# Altium PCB Draft 1 - Incomplete.PcbDoc
Units mil, origin at the board's own origin, x right, y up, seen from the top; angles counter-clockwise.
Board outline 10000 x 3000 mil, 2 copper layers (Top Layer, Bottom Layer); 75 components, 133 nets, 486 pads, 97 vias.
Unrouted connection lines stored in the file: 158.
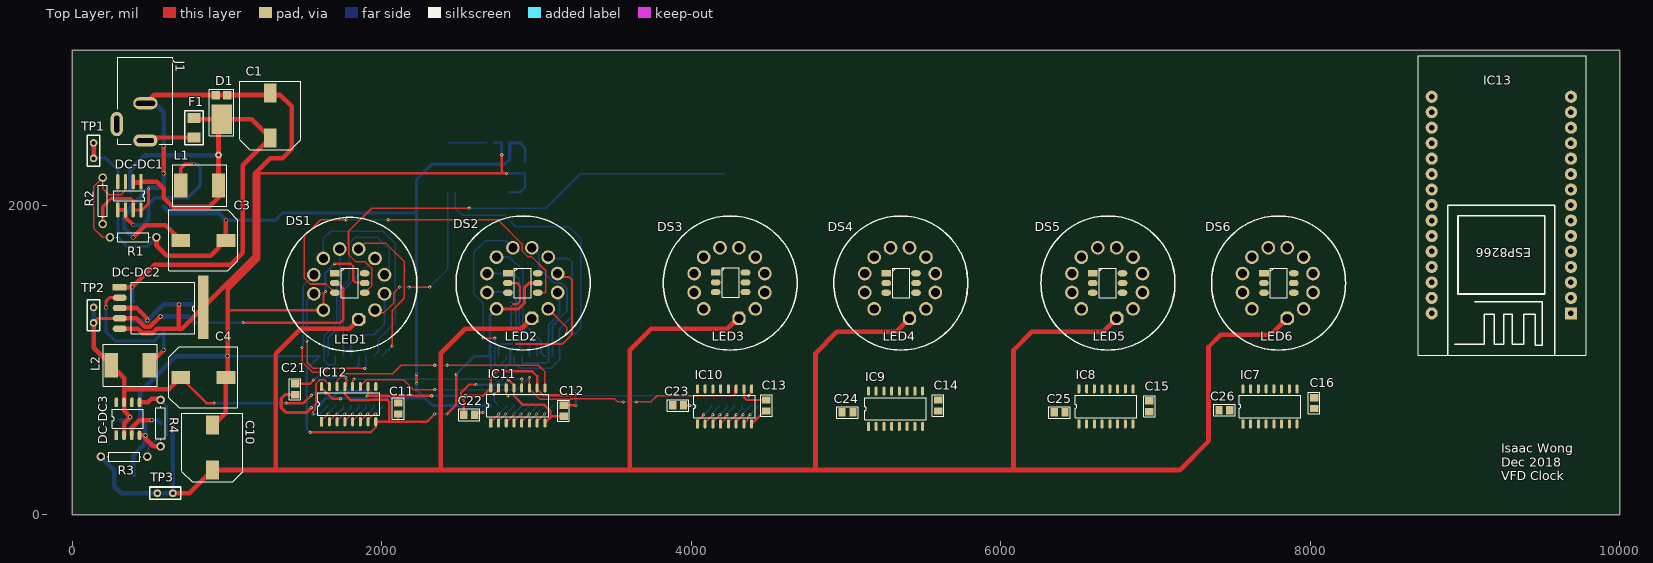
[diagram p0: Top Layer view]
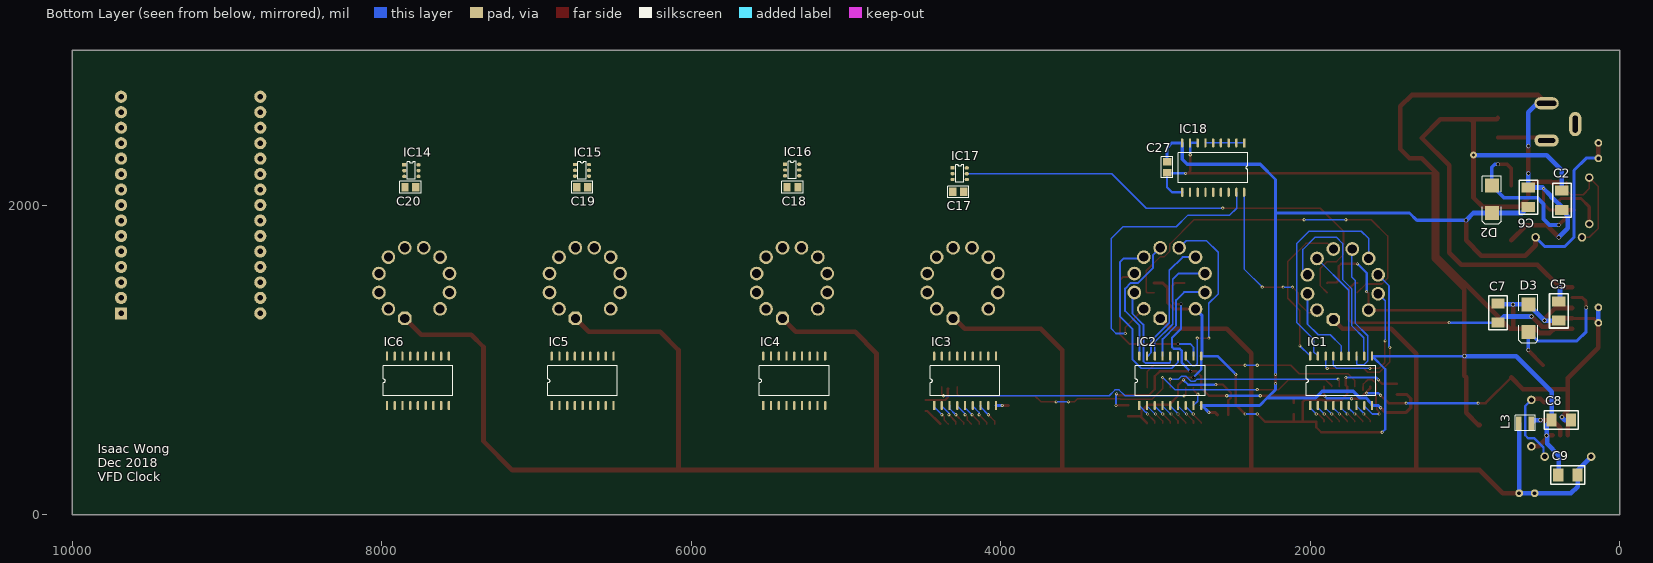
[diagram p1: Bottom Layer view, seen from below]

## Layer stack, top to bottom
Top Solder: solder mask 0.4, Solder Resist, Dk 3.5
Top Layer: signal copper 1.4
Dielectric 1: dielectric 12.6, FR-4, Dk 4.8
Bottom Layer: signal copper 1.4
Bottom Solder: solder mask 0.4, Solder Resist, Dk 3.5

## Board outline
0,0 10000,0 10000,3000 0,3000

## Design rules (kind name [scope] priority, off if disabled: settings)
Clearance [All] p1: gap=10 ignorepadtopadclearanceinfootprint=FALSE except(0: Arc-Hole Track-Hole SMDPad-Hole THPad-Hole Via-Hole Fill-Hole Poly-Hole Region-Hole Text-Hole)
PolygonConnect [All] p1: connectstyle=Relief reliefconductorwidth=10 reliefentries=4 polygonreliefangle="90 Angle" airgapwidth=10
RoutingVias [All] p1: holewidth=10 width=20 viastyle="Through Hole" minholewidth=10 minwidth=18 maxholewidth=30 maxwidth=45
SolderMaskExpansion [All] p1: expansion=4
Width NetF1-1 [InNet('NetF1_1')] p1: maxlimit=30 minlimit=20 preferedwidth=25 minimp=50.000000 maximp=50.000000 favimp=50.000000
Width Vcc [InNet('VCC')] p2: maxlimit=40 minlimit=20 preferedwidth=30 minimp=50.000000 maximp=50.000000 favimp=50.000000
Width 1.5V [InNet('+1.5')] p3: maxlimit=40 minlimit=15 preferedwidth=30 minimp=50.000000 maximp=50.000000 favimp=50.000000
Width 5V [InNet('+5')] p4: maxlimit=40 minlimit=15 preferedwidth=30 minimp=50.000000 maximp=50.000000 favimp=50.000000
Width 27V [InNet('+27')] p5: maxlimit=40 minlimit=20 preferedwidth=30 minimp=50.000000 maximp=50.000000 favimp=50.000000
Width GND [InNet('GND')] p6: maxlimit=40 minlimit=15 preferedwidth=30 minimp=50.000000 maximp=50.000000 favimp=50.000000
30 further rules are at their usual default settings.

## Components (designator, comment, footprint, x,y, rotation, side; value= is the part's Value field where it differs from the comment)
C1 "Polarised Cap" 10x10.2 1279.53,2578.74 r270 top value=470uF
C2 "Cap" 1206 374.02,2031 r90 bottom value=47uF
C3 "Polarised Cap" 10x10.2 846.46,1771.65 r0 top value=470uF
C4 "Polarised Cap" 10x10.2 846.46,885.83 r180 top value=470uF
C5 "Cap" 1206 393.7,1315.45 r90 bottom value=47uF
C6 "Cap" 1206 590.55,2050.69 r270 bottom value=47uF
C7 "Cap" 1206 787.4,1302.66 r270 bottom value=47uF
C8 "Cap" 1206 377.46,610.24 r180 bottom value=47uF
C9 "Cap" 1206 334.65,255.91 r180 bottom value=47uF
C10 "Polarised Cap" 10x10.2 905.51,433.07 r270 top value=470uF
C11 "Cap" 0805 2106.3,685.04 r270 top value=470nF
C12 "Cap" 0805 3175,670.43 r270 top value=470nF
C13 "Cap" 0805 4485,705 r270 top value=470nF
C14 "Cap" 0805 5595,705 r90 top value=470nF
C15 "Cap" 0805 6960,699.57 r270 top value=470nF
C16 "Cap" 0805 8025,720 r270 top value=470nF
C17 "Cap" 0805 4275,2085 r0 bottom value=470nF
C18 "Cap" 0805 5345.43,2115 r0 bottom value=470nF
C19 "Cap" 0805 6705,2115 r0 bottom value=470nF
C20 "Cap" 0805 7815,2115 r0 bottom value=470nF
C21 "Cap" 0805 1440,810 r90 top value=470nF
C22 "Cap" 0805 2565,645 r180 top value=470nF
C23 "Cap" 0805 3915,705 r180 top value=470nF
C24 "Cap" 0805 5010,660 r180 top value=470nF
C25 "Cap" 0805 6380.43,660 r180 top value=470nF
C26 "Cap" 0805 7445.43,675 r180 top value=470nF
C27 "Cap" 0805 2925,2244.57 r270 bottom value=470nF
D1 "Diode" PowerDi5 964.57,2598.43 r180 top
D2 "Schottky" SMB 826.77,2037.4 r270 bottom
D3 "Schottky" SMB 590.55,1269.69 r270 bottom
DC-DC1 "XL6001E1" SOP8 443.7,2151.18 r270 top
DC-DC2 "XL2596S-5.0E1" TO-263-5 306.46,1468.58 r0 top
DC-DC3 "NCP1579DR2G" SOP8-Buck 284.65,511.81 r90 top
DS1 "IV-11" IV-11 1794.25,1487.99 r0 top
DS2 "IV-11" IV-11 2913.39,1496.06 r0 top
DS3 "IV-11" IV-11 4251.97,1496.06 r0 top
DS4 "IV-11" IV-11 5354.33,1496.06 r0 top
DS5 "IV-11" IV-11 6692.91,1496.06 r0 top
DS6 "IV-11" IV-11 7795.28,1496.06 r0 top
F1 "SMD Fuse" 1206 787.4,2500 r90 top
IC1 "MIC2981BWM" "SOP18 (WM)" 2000.39,704.72 r90 bottom
IC2 "MIC2981BWM" "SOP18 (WM)" 3104.33,704.72 r90 bottom
IC3 "MIC2981BWM" "SOP18 (WM)" 4430.71,704.72 r90 bottom
IC4 "MIC2981BWM" "SOP18 (WM)" 5534.65,704.72 r90 bottom
IC5 "MIC2981BWM" "SOP18 (WM)" 6901.97,704.72 r90 bottom
IC6 "MIC2981BWM" "SOP18 (WM)" 7966.54,704.72 r90 bottom
IC7 "74HC595D" SO16 7565,551 r90 top
IC8 "74HC595D" SO16 6505,551 r90 top
IC9 "74HC595D" SO16 5145,536 r90 top
IC10 "74HC595D" SO16 4040,551 r90 top
IC11 "74HC595D" SO16 2704.33,556.55 r90 top
IC12 "74HC595D" SO16 1611.02,565.5 r90 top
IC13 "ESP8266" ESP8266 9685.04,1300 r180 top
IC14 "PI4ULS5V201" SOT23-6L 7854.33,2259.84 r180 bottom
IC15 "PI4ULS5V201" SOT23-6L 6751.97,2261.81 r180 bottom
IC16 "PI4ULS5V201" SOT23-6L 5393.7,2263.78 r180 bottom
IC17 "PI4ULS5V201" SOT23-6L 4311.02,2240.16 r180 bottom
IC18 "MIC2981BWM" "SOP18 (WM)" 2427.17,2401.57 r270 bottom
J1 "DC-005" NINIGI_DC-005 472.44,2523.62 r270 top
L1 "22uH" 7x7 822.83,2125.98 r180 top
L2 "22uH" 7x7 374.02,964.57 r180 top
L3 "2.2uH" "1008 Inductor" 610.87,590.55 r0 bottom
LED1 "WS2813B" 5050 1696.85,1559.06 r0 top
LED2 "WS2813B" 5050 2814.96,1559.06 r0 top
LED3 "WS2813B" 5050 4157.48,1562.99 r0 top
LED4 "WS2813B" 5050 5259.84,1559.06 r0 top
LED5 "WS2813B" 5050 6594.49,1559.06 r0 top
LED6 "WS2813B" 5050 7700.79,1559.06 r0 top
R1 "Res1" AXIAL-0.3 393.7,1791.34 r0 top value=150K
R2 "Res1" AXIAL-0.3 196.85,2027.56 r90 top value=1.2K
R3 "Res1" AXIAL-0.3 334.65,374.02 r180 top value=88.7K
R4 "Res1" AXIAL-0.3 570.87,590.55 r90 top value=59K
TP1 "2P Test Point" 2P-TestPoint 137.8,2301.57 r90 top
TP2 "2P Test Point" 2P-TestPoint 137.8,1238.58 r90 top
TP3 "2P Test Point" 2P-TestPoint 649.61,137.8 r180 top

## Footprints (in the part's own frame and the unit in brackets; to place one, negate y for a bottom-side part, rotate by r counter-clockwise, add the part's x,y. Pads: shape width x height; smd on the part's side, far side on the other; paste and mask are expansions set on the pad)
2P-TestPoint [mil]
  round 50 hole 25: TP(0,0) TP(100,0)
  silkscreen extent -50,-40 150,40
7x7 [mm]
  rect 2.2x4 smd: 1(-3.1,0) 2(3.1,0)
  silkscreen extent -4.44,-3.43 4.45,3.43
10x10.2 [mm]
  rect 3.1x2.1 smd: 1(-3.7,0) 2(3.7,0)
  silkscreen extent -5.64,-5 5.64,5
0805 [mm] "Chip Resistor, Body 2.0x1.2mm, IPC Medium Density"
  rect 1.2x1.4 smd: 1(-0.9,0) 2(0.9,0)
  silkscreen extent -1.75,-0.95 1.75,0.95
"1008 Inductor" [mm]
  rect 0.9x2.2 smd: 1(-1.016,0) 2(1.016,0)
  silkscreen extent -1.65,-1.27 1.65,1.27
1206 [mil]
  rect 65x85 smd: 1(-62.5,0) 2(62.5,0)
  silkscreen extent -110,-60 110,60
5050 [mm]
  rect 1.6x1 smd: 1(0,0)
  oval 1.6x1 smd: 2(0,-1.6) 3(0,-3.2) 4(4.9,-3.2) 5(4.9,-1.6) 6(4.9,0)
  silkscreen extent 1.07,-4 3.86,0.8
AXIAL-0.3 [mm] "Axial Device, Thru-Hole; 2 Leads; 0.3 in Pin Spacing"
  round 1.4 hole 0.85: 1(-3.81,0) 2(3.81,0)
  silkscreen extent -2.77,-0.76 2.77,0.76
ESP8266 [mm]
  rect 2x2 hole 0.9: 1(0,0)
  round 2 hole 0.9: 2(0,-2.54) 3(0,-5.08) 4(0,-7.62) 5(0,-10.16) 6(0,-12.7) 7(0,-15.24) 8(0,-17.78) 9(0,-20.32) 10(0,-22.86) 11(0,-25.4) 12(0,-27.94) 13(0,-30.48) 14(0,-33.02) 15(0,-35.56) 16(22.86,-35.56) 17(22.86,-33.02) 18(22.86,-30.48) 19(22.86,-27.94) 20(22.86,-25.4) 21(22.86,-22.86) 22(22.86,-20.32) 23(22.86,-17.78) 24(22.86,-15.24) 25(22.86,-12.7) 26(22.86,-10.16) 27(22.86,-7.62) 28(22.86,-5.08) 29(22.86,-2.54) 30(22.86,0)
  silkscreen extent -2.41,-42.29 25.15,6.86
IV-11 [mm]
  round 2.25 / inner round 1.524 / far side round 2.25 hole 1.5: A(1.426,5.795) B(-4.37,4.243) C(-5.922,1.553) D(-5.922,-1.553) DP(5.668,1.553) E(5.668,-1.553) F(4.116,4.243) F-(-4.37,-4.243) G(-1.68,5.795) Grid(4.116,-4.243)
  oct 2.179x2.179 / inner oct 1.524x1.524 / far side oct 2.179x2.179 hole 1.5: F+(1.426,-5.795)
  silkscreen extent -11,-11 11,11
NINIGI_DC-005 [mm]
  oval 2x4 hole 0.75 slot 2.794 at 90 deg: 2(2.7,0)
  oval 4x2 hole 0.8 slot 2.794 at 0 deg: 4(0,-4.7)
  oval 2x4 hole 0.801 slot 3.2 at 90 deg: 5(-3.4,0)
  silkscreen extent -11,-4.5 3.3,4.5
PowerDi5 [mm]
  rect 1.39x1.4 smd: 1(-0.92,-2.856) 2(0.92,-2.856)
  rect 3.36x4.86 smd: 3(0,1.126)
  silkscreen extent -1.98,-3.81 1.98,3.81
SMB [mm] "DO-214-AA/SMB; 2 C-Bend Leads; Body 5.3 x 3.6 mm, inc. leads (LxW)"
  rect 2.3x2.3 smd: 1(-2.25,0) 2(2.25,0)
  silkscreen extent -3.8,-1.55 4.1,1.55
SO16 [mm]
  rect 1.5x0.5 smd: 1(0.864,0)
  oval 1.5x0.5 smd: 2(0.864,-1.27) 3(0.864,-2.54) 4(0.864,-3.81) 5(0.864,-5.08) 6(0.864,-6.35) 7(0.864,-7.62) 8(0.864,-8.89) 9(6.636,-8.89) 10(6.636,-7.62) 11(6.636,-6.35) 12(6.636,-5.08) 13(6.636,-3.81) 14(6.636,-2.54) 15(6.636,-1.27) 16(6.636,0)
  silkscreen extent 1.91,-9.53 5.59,0.64
SOP8 [mil]
  rect 98.42x22 smd: 1(0,0)
  oval 98.43x22 smd: 2(0,-50) 3(0,-100) 4(0,-150) 5(182.68,-150) 6(182.68,-100) 7(182.68,-50) 8(182.68,0)
  silkscreen extent 57,-175 125,25
SOP8-Buck [mil]
  rect 63x24 smd: 1(0,0)
  oval 63x24 smd: 2(0,-50) 3(0,-100) 4(0,-150) 5(213,-150) 6(213,-100) 7(213,-50) 8(213,0)
  silkscreen extent 45,-175 170,25
"SOP18 (WM)" [mm]
  rect 1.5x0.381 smd: 1(0,0)
  oval 1.5x0.381 smd: 2(0,-1.27) 3(0,-2.54) 4(0,-3.81) 5(0,-5.08) 6(0,-6.35) 7(0,-7.62) 8(0,-8.89) 9(0,-10.16) 10(8.1,-10.16) 11(8.1,-8.89) 12(8.1,-7.62) 13(8.1,-6.35) 14(8.1,-5.08) 15(8.1,-3.81) 16(8.1,-2.54) 17(8.1,-1.27) 18(8.1,0)
  silkscreen extent 1.58,-10.79 6.52,0.63
SOT23-6L [mm]
  rect 0.7x0.55 smd: 1(0,0)
  oval 0.7x0.55 smd: 2(0,-0.95) 3(0,-1.9) 4(2.325,-1.9) 5(2.325,-0.95) 6(2.325,0)
  silkscreen extent 0.51,-2.38 1.83,0.48
TO-263-5 [mm]
  rect 2.3x1.05 smd: 1(0,0)
  oval 2.3x1.05 smd: 2(0,-1.7) 3(0,-3.4) 4(0,-5.1) 5(0,-6.8)
  rect 1.66x10.428 smd: 3(13.716,-3.302)
  silkscreen extent 1.89,-7.65 12.32,0.85

## Part data
D2 D3: library part "D Schottky", "Schottky Diode", Code_JEDEC=DO-214-AA, LatestRevisionDate=17-Jul-2002, LatestRevisionNote="Re-released for DXP Platform.", PackageDescription="DO-214-AA/SMB; 2 C-Bend Leads; Body 5.3 x 3.6 mm, inc. leads (LxW)", PackageReference=SMB, Published=8-Jun-2000, Publisher="Altium Limited"
J1: Package=None, Availability=Unavailable, MF="Best Inc.", MP=DC-005, Price=None, SnapEDA_Link=https://www.snapeda.com/parts/DC-005/Best%20Inc./view-part/?ref=snap
L1 L2: library part BCIHP0730
L3: library part "SMD Inductor 1008"
R1 R2 R3 R4: "Resistor", LatestRevisionDate=17-Jul-2002, LatestRevisionNote="Re-released for DXP Platform.", PackageDescription="Axial Device, Thru-Hole; 2 Leads; 0.3 in Pin Spacing", PackageReference=AXIAL-0.3, Published=8-Jun-2000, Publisher="Altium Limited"
C1 C3 C4 C10: PackageDescription="Capacitor; 2 Leads", PackageReference=CAPR5-4X5, Published=23-Sep-2002, Publisher="Altium Limited"
C2 C5 C6 C7 C8 C9 C11 C12 C13 C14 C15 C16 C17 C18 C19 C20 C21 C22 C23 C24 C25 C26 C27: LatestRevisionDate=17-Jul-2002, LatestRevisionNote="Re-released for DXP Platform.", PackageDescription="Radial Cap, Thru-Hole; 2 Leads; 0.3 in Pin Spacing", PackageReference=RAD-0.3, Published=8-Jun-2000, Publisher="Altium Limited"
D1: Code_JEDEC=DO-214-AB, LatestRevisionDate=17-Jul-2002, LatestRevisionNote="Re-released for DXP Platform.", PackageDescription="DO-214-AB/SMC; 2 C-Bend Leads; Body 7.9 x 5.9 mm, inc. leads (LxW)", PackageReference=SMC, PackageVersion=Sep-1996, Published=8-Jun-2000, Publisher="Altium Limited"

## Via types
v1: diameter 20, hole 10, Top Layer to Bottom Layer, 76 vias
v2: diameter 25, hole 20, Top Layer to Bottom Layer, 16 vias
v3: diameter 20, hole 20, Top Layer to Bottom Layer, 4 vias
v4: diameter 45, hole 20, Top Layer to Bottom Layer, 1 vias

## Nets (pads, with @x,y where several pads share a name; then routed paths per layer and width w, separated by ;. In a path a pad name is that pad's centre, name@x,y a point inside that pad or via, vN(x,y) a via of type N, cw(c..) or ccw(c..) an arc to the next point about the centre after c; other vN are vias at no path point)
+1.5: C9.2 C10.2 DS1.F+ DS2.F+ DS3.F+ DS4.F+ DS5.F+ DS6.F+ L3.2 R3.2 TP3.TP | length 16471.7
  Top Layer w30: TP3.TP@649.61,137.8 755.91,137.8 C10.2 1318.9,287.4 ; DS1.F+ 1791.34,1200.79 1476.38,1200.79 1315,1039.41 1315,291.3 1318.9,287.4 ; DS2.F+ 2902.4,1200.79 2539.37,1200.79 2381.89,1043.31 2381.89,287.4 ; DS3.F+ 4299.41,1267.91 4232.28,1200.79 3740.16,1200.79 3602.36,1062.99 3602.36,287.4 ; DS4.F+ 5323.66,1181.1 4940.94,1181.1 4803.15,1043.31 4803.15,287.4 ; DS5.F+ 6662.24,1181.1 6200.79,1181.1 6082.68,1062.99 6082.68,287.4 ; DS6.F+ 7744.92,1161.42 7421.26,1161.42 7342.52,1082.68 7342.52,472.44 7157.48,287.4 6082.68,287.4 ; 1318.9,287.4 2381.89,287.4 ; 2381.89,287.4 3602.36,287.4 ; 3602.36,287.4 4803.15,287.4 ; 4803.15,287.4 6082.68,287.4
  Bottom Layer w30: R3.2 272.15,286.52 C9.2 272.15,180.61 314.96,137.8 549.61,137.8 649.61,137.8 649.61,589.29 L3.2
+3.3: IC13.11 IC14.3 IC14.6 IC15.3 IC15.6 IC16.3 IC16.6 IC17.3 IC17.6
+5: C4.2 C7.2 C8.2 C11.1 C12.1 C13.1 C14.1 C15.1 C16.1 C17.1 C18.1 C19.1 C20.1 DC-DC2.4 DC-DC3.2 DC-DC3.7 IC7.10 IC7.16 IC8.10 IC8.16 IC9.10 IC9.16 IC10.10 IC10.16 IC11.10 IC11.16 IC12.10 IC12.16 IC13.15 IC14.4 IC15.4 IC16.4 IC17.4 L2.2 LED1.2 LED2.2 LED3.2 LED4.2 LED5.2 LED6.2 TP2.TP | length 7586.7
  Top Layer w15: C4.2 866.61,720 v1(915,720) ; v1(1102.36,1240.16) 1732.28,1240.16 1751.97,1259.84 1751.97,1456.69 1712.6,1496.06 LED1.2 ; v1(1380,720) 1494.02,720 v1(1545,770.98) ; IC12.16 1611.02,818.42 1635,794.44 v1(1635,784.25) 1645.19,784.25 1681.41,748.03 v1(1732.28,748.03) ; IC12.10 1911.02,771.02 v1(1905,765) 1909.88,765 1912.6,767.72 2106.3,767.72 ; C11.1 2106.3,767.72 ; v1(2322.83,767.72) 2106.3,767.72 ; v1(2539.37,767.72) 2654.22,767.72 IC11.16 2704.33,893.31 2736.22,925.2 v3(2775.59,925.2) 2972.44,925.2 3004.33,893.31 IC11.10 3004.33,809.47 3043.01,770.8 3185.8,770.8 3186.07,770.53 3241.56,770.53 v1(3251.02,780) ; LED2.2 2874.02,1496.06 2893.7,1476.38 2893.7,1377.95 2874.02,1358.27 2837.91,1358.27 v3(2834.65,1361.53) ; C12.1 3254.13,705.87 v1(3255,705) ; IC10.10 4342.58,812.28 4342.58,756.33 4358.69,740.22 4485,740.22 C13.1
  Top Layer w20: TP2.TP@137.8,1238.58 167.01,1267.8 DC-DC2.4
  Top Layer w30: TP2.TP@137.8,1238.58 137.8,1078.74 L2.2 334.65,881.89 334.65,810 ; DC-DC2.4 413.82,1267.8 468.67,1212.95 501.8,1212.95 568.38,1279.53 v2(570.87,1279.53) ; DC-DC3.2 334.65,590.55 v2(374.02,629.92) 334.65,669.29 DC-DC3.7 334.65,810 ; C4.2 624.96,810 334.65,810
  Bottom Layer w15: C7.2 v1(1102.36,1240.16) ; v1(915,720) v1(1380,720) ; v1(1545,770.98) 1558.27,784.25 v1(1635,784.25) ; v1(1732.28,748.03) 1736,751.75 1893.48,751.75 1905,763.27 v1(1905,765) ; v1(2322.83,767.72) v1(2539.37,767.72) ; v3(2775.59,925.2) 2829.33,978.94 2829.33,1057.68 2834.65,1062.99 2836.32,1062.99 2843.98,1070.65 2881.67,1070.65 2893.7,1082.68 2893.7,1141.73 2834.65,1200.79 v3(2834.65,1361.53) ; v1(3251.02,780) 3255,776.02 v1(3255,705)
  Bottom Layer w30: TP2.TP@137.8,1238.58 TP2.TP@137.8,1338.58 ; C8.2 354.33,610.24 v2(374.02,629.92) ; v2(570.87,1279.53) 748.03,1279.53 C7.2
+27: C3.2 C6.2 C21.1 C22.1 C23.1 C24.1 C25.1 C26.1 C27.1 D2.2 IC1.9 IC2.9 IC3.9 IC4.9 IC5.9 IC6.9 IC18.9 R1.2 TP1.TP | length 7636.8
  Top Layer w20: C21.1 1374.57,774.57 1350,750 1350,690 1380,660 1515,660 v1(1545,690) ; v1(2224.41,846.46) v1(2224.41,905.51) ; C22.1 2615.43,660 v1(2655,660) ; C23.1 v1(3990,705)
  Top Layer w30: TP1.TP@137.8,2301.57 TP1.TP@137.8,2401.57 ; R1.2 543.7,1739.76 610.24,1673.23 893.7,1673.23 C3.2 v2(992.13,1901.57)
  Bottom Layer w20: TP1.TP@137.8,2301.57 139.37,2303.15 216.54,2303.15 295.28,2224.41 295.28,1791.34 354.33,1732.28 484.65,1732.28 R1.2 ; v2(992.13,1901.57) 1311.02,1901.57 1358.27,1948.82 2224.41,1948.82 ; v1(1545,690) 1559.72,704.72 IC1.9 1600.39,712.53 1622.89,735.03 1622.89,738.14 1639,754.25 1679.45,754.25 1721.99,796.79 1922.41,796.79 1964.95,754.25 2273.94,754.25 2275.59,755.91 ; v1(2224.41,846.46) 2224.41,807.09 2275.59,755.91 ; v1(2224.41,905.51) 2224.41,1948.82 ; v1(2655,660) IC2.9@2699.72,704.72 ; IC2.9 IC2.9@2699.72,704.72 ; C27.1 2925,2370 2893.43,2401.57 IC18.9 2827.17,2295.67 2795.28,2263.78 2322.83,2263.78 2224.41,2165.35 2224.41,1948.82 ; v1(3990,705) 4030.43,705 IC3.9 ; 2275.59,755.91 2326.77,704.72 IC2.9@2699.72,704.72
  Bottom Layer w30: C6.2 629.92,1948.82 D2.2 944.88,1948.82 v2(992.13,1901.57)
DS1-1: DS1.A IC1.18 | length 1028.9
  Top Layer w10: DS1.A 1886.22,1751.97 2027.56,1751.97 2145,1634.53 2145,1396.97 2066.93,1318.9 v1(2066.93,1090.16)
  Bottom Layer w10: IC1.18 v1(2066.93,1090.16)
DS1-2: DS1.B IC1.17 | length 1429.7
  Bottom Layer w10: DS1.B 1622.22,1783.29 1669.64,1830.71 2007.87,1830.71 2086.61,1751.97 2086.61,1240.16 1977.89,1131.44 1977.89,1051.12 IC1.17
DS1-3: DS1.C IC1.16 | length 1119.9
  Top Layer w10: v1(1485,1080) 1485,986.72 1551.83,919.88 1628.54,919.88 1653.54,944.88 v1(1889.76,944.88)
  Bottom Layer w10: v1(1485,1080) 1490.75,1085.75 1490.75,1478.78 DS1.C ; v1(1889.76,944.88) 1900.39,955.51 IC1.16
DS1-4: DS1.D IC1.15 | length 879.5
  Top Layer w10: v1(1515.75,1122.05) 1518.56,1119.23 1518.56,981.44 1555.12,944.88 v1(1614.17,944.88)
  Bottom Layer w10: v1(1515.75,1122.05) 1515.75,1381.5 DS1.D ; v1(1614.17,944.88) 1830.71,944.88 1850.39,964.57 IC1.15
DS1-5: DS1.E IC1.14 | length 539.2
  Bottom Layer w10: IC1.14 1800.39,1091.73 1870.08,1161.42 1948.82,1161.42 2017.4,1230 DS1.E
DS1-6: DS1.F IC1.13 | length 716.7
  Bottom Layer w10: IC1.13 1750.39,1449.13 DS1.F
DS1-7: DS1.G IC1.12 | length 905.8
  Bottom Layer w10: IC1.12 1700.39,972.05 1694.97,966.62 1653.54,966.62 1627.89,992.27 1627.89,1155.45 1710.39,1237.95 1710.39,1513.54 1732.28,1535.43 1732.28,1711.97 DS1.G
DS1-8: DS1.DP IC1.11 | length 1267.4
  Bottom Layer w10: IC1.11 1653.54,1026.77 1653.54,1141.73 1730.39,1218.58 1730.39,1457.42 1791.1,1518.12 1791.1,1751.73 1830.71,1791.34 1968.5,1791.34 2047.24,1712.6 2047.24,1578.97 DS1.DP
DS2-1: DS2.A IC2.18 | length 861.3
  Bottom Layer w12: DS2.A 3015.12,1678.62 3015.12,1593.35 3111.56,1496.91 3159.82,1496.91 3196.83,1459.9 3196.83,1315.32 3104.33,1222.82 IC2.18
DS2-2: DS2.B IC2.17 | length 820
  Bottom Layer w12: DS2.B 2825.1,1663.09 2910.64,1577.55 2910.64,1239.84 3027.83,1122.65 3027.83,1046.97 3051.18,1023.62 IC2.17
DS2-3: DS2.C IC2.16 | length 768.6
  Bottom Layer w12: DS2.C 2852.25,1557.2 2888.64,1520.81 2888.64,1230.73 3004.33,1115.04 IC2.16
DS2-4: DS2.D IC2.15 | length 606.7
  Bottom Layer w12: DS2.D 2682.32,1437.01 2814.96,1437.01 2866.64,1385.33 2866.64,1221.62 2954.33,1133.92 IC2.15
DS2-5: DS2.E IC2.14 | length 700.4
  Bottom Layer w12: IC2.14 2904.33,982.5 2908.74,978.09 3064.06,978.09 3077.83,991.86 3077.83,1227.44 3149.61,1299.21 3149.61,1421.85 DS2.E
DS2-6: DS2.F IC2.13 | length 1203
  Bottom Layer w12: IC2.13 2854.33,984.25 2893.7,944.88 3090.55,944.88 3149.61,1003.94 3149.61,1200.79 3228.35,1279.53 3228.35,1633.86 3208.66,1653.54 3084.97,1653.54 DS2.F
DS2-7: DS2.G IC2.12 | length 1240.3
  Top Layer w10: v1(2655,1140) v1(2730,1140)
  Bottom Layer w10: v1(2655,1140) 2655,1365 2595,1425 2595,1695 2670,1770 2801.46,1770 DS2.G ; v1(2730,1140) 2730,975 2745,960 2760,960 2804.33,1004.33 IC2.12
DS2-8: DS2.DP IC2.11 | length 1028.1
  Top Layer w12: v3(2854.33,1102.36) 3169.29,1102.36 3228.35,1161.42 3228.35,1515.75 3208.66,1535.43 3158.31,1535.43 DS2.DP
  Bottom Layer w12: IC2.11 2754.33,1081.1 2775.59,1102.36 v3(2854.33,1102.36)
DS3-1: DS3.A IC3.18
DS3-2: DS3.B IC3.17
DS3-3: DS3.C IC3.16
DS3-4: DS3.D IC3.15
DS3-5: DS3.E IC3.14
DS3-6: DS3.F IC3.13
DS3-7: DS3.G IC3.12
DS3-8: DS3.DP IC3.11
DS4-1: DS4.A IC4.18
DS4-2: DS4.B IC4.17
DS4-3: DS4.C IC4.16
DS4-4: DS4.D IC4.15
DS4-5: DS4.E IC4.14
DS4-6: DS4.F IC4.13
DS4-7: DS4.G IC4.12
DS4-8: DS4.DP IC4.11
DS5-1: DS5.A IC5.18
DS5-2: DS5.B IC5.17
DS5-3: DS5.C IC5.16
DS5-4: DS5.D IC5.15
DS5-5: DS5.E IC5.14
DS5-6: DS5.F IC5.13
DS5-7: DS5.G IC5.12
DS5-8: DS5.DP IC5.11
DS6-1: DS6.A IC6.18
DS6-2: DS6.B IC6.17
DS6-3: DS6.C IC6.16
DS6-4: DS6.D IC6.15
DS6-5: DS6.E IC6.14
DS6-6: DS6.F IC6.13
DS6-7: DS6.G IC6.12
DS6-8: DS6.DP IC6.11
GND: C1.1 C2.1 C3.1 C4.1 C5.1 C6.1 C7.1 C8.1 C9.1 C10.1 C11.2 C12.2 C13.2 C14.2 C15.2 C16.2 C17.2 C18.2 C19.2 C20.2 C21.2 C22.2 C23.2 C24.2 C25.2 C26.2 C27.2 D1.1 D1.2 D3.1 DC-DC1.7 DC-DC1.8 DC-DC2.3 DC-DC2.5 DC-DC3.4 DS1.F- DS2.F- DS3.F- DS4.F- DS5.F- DS6.F- IC1.10 IC2.10 IC3.10 IC4.10 IC5.10 IC6.10 IC7.8 IC7.13 IC8.8 IC8.13 IC9.8 IC9.13 IC10.8 IC10.13 IC11.8 IC11.13 IC12.8 IC12.13 IC13.10 IC14.2 IC15.2 IC16.2 IC17.2 IC18.7 IC18.8 IC18.10 J1.5 LED1.5 LED2.5 LED3.5 LED4.5 LED5.5 LED6.5 R2.1 R4.1 | length 18505
  Top Layer w15: 1003.94,1318.9 1006,1320.96 DS1.F- 1622.9,1321.64 1622.9,1427.9 v1(1635,1440) ; 1181.1,2204.72 1181.38,2205 1201.06,2205 2790,2205 ; C21.2 1535.43,845.43 v1(1560,870) ; v1(1535.43,531.5) 1929.13,531.5 1961.02,563.39 IC12.8 2047.24,599.5 ; v1(1695,1620) 1800,1620 1815,1605 1815,1515 1830,1500 1885.83,1500 LED1.5 ; v1(1770,885) 1770,835.75 IC12.13 1761.02,778.35 1801.87,737.5 1917.74,737.5 1922.95,742.72 2032.87,742.72 2047.24,728.35 2047.24,599.5 ; C11.2 2106.3,599.5 ; v1(2342.52,649.61) 2292.41,599.5 2106.3,599.5 ; v1(2421.26,649.61) 2480.32,708.66 v1(2480.32,905.51) ; C22.2 2529.57,738.63 2511.87,756.33 2511.87,786.87 2565,840 v1(2610,840) ; v3(2755.91,885.83) 2804.17,885.83 v1(2820,870) 2854.33,835.67 IC11.13 2854.33,767.72 2913.39,708.66 3051.18,708.66 3090.55,669.29 3090.55,626.77 ; v1(2775,2325) 2775,2220 2790,2205 ; v1(2805,2205) 2790,2205 ; IC11.8 3090.55,626.77 ; C12.2 3098.78,635 3090.55,626.77 ; IC10.8 4474.57,669.57 C13.2 ; 2047.24,599.5 2106.3,599.5
  Top Layer w20: R2.1 196.85,1988.19 250.59,2041.93 379.33,2041.93 393.7,2027.56 DC-DC1.7 DC-DC1.8 452.76,1968.5 492.13,2007.87 v1(492.13,2106.3) ; DS2.F- 2883.67,1329.03 2921.2,1366.56 2921.2,1464.51 2952.76,1496.06 LED2.5
  Top Layer w30: DC-DC2.5 424.19,1200.87 452.1,1172.95 518.37,1172.95 546.29,1200.87 688.98,1200.87 ; DC-DC2.3@306.46,1334.72 417.24,1334.72 485.24,1266.73 v2(485.24,1252.95) ; v2(393.7,1791.34) 472.44,1870.08 602.36,1870.08 C3.1 ; DC-DC3.4 v2(472.44,511.81) 472.44,492.13 524.01,440.55 R4.1 ; J1.5 525.83,2710.87 D1.2 D1.1 1344.25,2710.87 1417.32,2637.8 1417.32,2362.2 1358.27,2303.15 1279.53,2303.15 1181.38,2205 ; v2(590.55,2204.72) v2(590.55,2381.89) ; v2(688.98,1358.27) 688.98,1200.87 ; C10.1 913.39,578.74 992.13,657.48 C4.1 1003.94,897.64 v2(1003.94,1023.62) 1003.94,1318.9 1003.94,1456.69 1200.79,1653.54 1200.79,2204.72 1201.06,2205 ; 1181.1,2204.72 1181.1,1673.23 846.46,1338.58 708.74,1200.87 688.98,1200.87
  Bottom Layer w15: v2(1003.94,1023.62) IC1.10 1515.75,938.98 1515.75,551.18 v1(1535.43,531.5) ; v1(1560,870) 1575,885 v1(1770,885) ; v1(1635,1440) 1635,1560 v1(1695,1620) ; v1(2342.52,649.61) v1(2421.26,649.61) ; v1(2480.32,905.51) 2598.43,1023.62 IC2.10 2704.33,937.4 v3(2755.91,885.83) ; v1(2610,840) 2611.67,838.33 2788.33,838.33 v1(2820,870) ; IC18.7 IC18.8 2775,2399.41 v1(2775,2325) ; v1(2805,2205) 2920.87,2205 C27.2 2925,2115 2892.68,2082.68 IC18.10
  Bottom Layer w20: IC2.10 2700,1027.95 2700,1287.68 DS2.F-
  Bottom Layer w30: C5.1 v2(485.24,1252.95) D3.1 v2(688.98,1358.27) 780.51,1358.27 C7.1 ; v2(393.7,1791.34) 334.65,1850.39 334.65,1929.13 C2.1 374.02,1988.19 421.83,2036 426.87,2036 441.52,2050.65 441.52,2055.69 499.02,2113.19 C6.1 v2(590.55,2204.72) ; C9.1 393.7,255.91 393.7,380.61 469.14,456.05 469.14,508.52 v2(472.44,511.81) 472.44,577.76 C8.1 439.96,794.29 669.29,1023.62 v2(1003.94,1023.62) ; J1.5 531.5,2657.48 590.55,2598.43 v2(590.55,2381.89)
NetD2_1: D2.1 DC-DC1.5 DC-DC1.6 L1.2 | length 1139.8
  Top Layer w25: DC-DC1.5 DC-DC1.6 343.7,1920.08 v2(393.7,1870.08) ; L1.2 700.79,2236.22 728.35,2263.78 v2(787.4,2263.78)
  Bottom Layer w25: v2(393.7,1870.08) 452.76,1870.08 492.13,1909.45 492.13,2007.87 531.5,2047.24 748.03,2047.24 D2.1 826.77,2244.09 807.09,2263.78 v2(787.4,2263.78)
NetD3_2: D3.2 DC-DC2.2 L2.1 | length 975.2
  Top Layer w20: v2(216.54,1338.58) 216.54,1377.95 240.24,1401.65 DC-DC2.2
  Top Layer w25: L2.1 590.55,1059.06 v2(590.55,1062.99)
  Bottom Layer w20: v2(216.54,1338.58) 216.54,1181.1 275.59,1122.05 531.5,1122.05 D3.2
  Bottom Layer w25: v2(590.55,1062.99) D3.2
NetDC-DC1_3: DC-DC1.3 R1.1 R2.2 | length 783.8
  Top Layer w10: R1.1 196.85,1791.34 137.8,1850.39 137.8,2118.51 R2.2 196.85,2106.3 236.22,2066.93 314.96,2066.93 343.7,2095.67 DC-DC1.3
NetDC-DC3_3: DC-DC3.3 L3.1 | length 264.4
  Top Layer w30: DC-DC3.3 384.65,561.81 433.07,610.24 v2(511.81,610.24)
  Bottom Layer w30: v2(511.81,610.24) 551.18,610.24 L3.1
NetDC-DC3_5: DC-DC3.5 R3.1 R4.2 | length 606.9
  Top Layer w30: DC-DC3.5 488.59,724.81 511.81,748.03 563.39,748.03 R4.2
  Bottom Layer w15: R3.1 492.13,381.5 492.13,433.07 551.18,492.13 590.55,492.13 610.24,511.81 610.24,701.18 R4.2
NetDS1_Grid: DS1.Grid IC18.18 | length 1127.5
  Top Layer w10: DS1.Grid 1972.25,1305 2014.14,1305 2076.7,1367.56 2076.7,1431.7 v1(2115,1470) ; v1(2175,1470) v1(2310,1470)
  Bottom Layer w10: v1(2115,1470) v1(2175,1470) ; v1(2310,1470) 2427.17,1587.17 IC18.18
NetDS2_Grid: DS2.Grid IC18.17 | length 1890.3
  Top Layer w10: DS2.Grid 3195,1209.45 v1(3195,1170)
  Bottom Layer w10: IC18.17 2475,2080.51 2475,1980 2520,1935 2790,1935 2865,1860 3210,1860 3285,1785 3285,1200 3255,1170 v1(3195,1170)
NetDS3_Grid: DS3.Grid IC18.16
NetDS4_Grid: DS4.Grid IC18.15
NetDS5_Grid: DS5.Grid IC18.14
NetDS6_Grid: DS6.Grid IC18.13
NetF1_1: F1.1 J1.2 | length 323.3
  Top Layer w25: J1.2 492.62,2437.5 F1.1
NetIC7_9: IC7.9 IC8.14
NetIC7_11: IC7.11 IC8.11 IC9.11 IC10.11 IC11.11 IC12.11 IC15.5 | length 2679.5
  Top Layer w10: IC12.11 1861.02,831.59 1900.73,871.3 2140.51,871.3 2204.72,807.09 v1(2342.52,807.09) ; v1(2954.33,884.25) IC11.11 2954.33,813.01 3022.85,744.49 3225.16,744.49 3228.7,748.03 3503.94,748.03 3523.62,728.35 v1(3562.99,728.35) ; v1(3641.73,728.35) 3740.16,728.35 3779.53,767.72 4271.65,767.72 4282.28,778.35 IC10.11@4282.28,826.77
  Bottom Layer w10: v1(2342.52,807.09) 2874.02,807.09 2951.18,884.25 v1(2954.33,884.25) ; v1(3562.99,728.35) v1(3641.73,728.35)
NetIC7_12: IC7.12 IC8.12 IC9.12 IC10.12 IC11.12 IC12.12 IC16.5 | length 1222.1
  Top Layer w10: IC12.12 1811.02,866.14 v1(1820.08,875.2) ; IC11.12 v1(2904.33,875.2)
  Bottom Layer w10: v1(1820.08,875.2) 2731.18,875.2 2745.55,860.83 2769.8,860.83 2803.97,895 2830.36,895 2850.16,875.2 v1(2904.33,875.2)
NetIC7_14: IC7.14 IC14.5
NetIC8_9: IC8.9 IC9.14
NetIC9_9: IC9.9 IC10.14
NetIC10_9: IC10.9 IC11.14 | length 1706.9
  Top Layer w10: IC11.14 2804.33,776.77 v1(2814.96,766.14) ; v1(4370.08,767.72) 4382.28,779.92 IC10.9@4382.28,826.77
  Bottom Layer w10: v1(2814.96,766.14) 2816.54,767.72 3197.72,767.72 3235,805 3261.82,805 3299.1,767.72 v1(4370.08,767.72)
NetIC11_9: IC11.9 IC12.14 | length 1544.4
  Top Layer w10: IC12.14 1712.6,828.35 1712.6,866.14 1756.46,910 2071.42,910 2125.98,964.57 v1(2342.52,964.57) ; v1(2421.26,964.57) 3011.81,964.57 3054.33,922.05 IC11.9
  Bottom Layer w10: v1(2342.52,964.57) v1(2421.26,964.57)
NetIC13_20: IC13.20 IC16.1
NetIC13_21: IC13.21 IC14.1
NetIC13_23: IC13.23 IC15.1
NetIC13_27: IC13.27 IC17.1
NetIC13_28: IC13.28 IC18.1 IC18.2 IC18.3 IC18.4 IC18.5 IC18.6 | length 250
  Bottom Layer w10: IC18.1 IC18.2 IC18.3 IC18.4 IC18.5 IC18.6
NetIC17_5: IC17.5 LED1.4 | length 3102.9
  Top Layer w10: LED1.4 1936.26,1479.57 1936.26,1588.74 1890,1635 1830,1635 1787.41,1677.59 1787.41,1740.7 1785,1743.11 1785,1830 1935,1980 v1(2565,1980)
  Bottom Layer w10: v1(2565,1980) 3060,1980 3282.76,2202.76 IC17.5
NetLED1_3: LED1.3 LED2.4 | length 2465.9
  Top Layer w10: LED1.3 1640.08,1489.84 1536.54,1489.84 1500,1526.38 1500,1800 1605,1905 v1(1770,1905) ; v1(2040,1905) 2750.31,1905 2906.54,1748.77 2906.54,1703.34 2944.97,1664.92 2970.08,1664.92 3060,1575 3060,1440 3053.07,1433.07 LED2.4
  Bottom Layer w10: v1(1770,1905) v1(2040,1905)
NetLED2_3: LED2.3 LED3.4
NetLED3_3: LED3.3 LED4.4
NetLED4_3: LED4.3 LED5.4
NetLED5_3: LED5.3 LED6.4
Q7-1: IC6.1 IC7.7
Q7-2: IC6.2 IC7.6
Q7-3: IC6.3 IC7.5
Q7-4: IC6.4 IC7.4
Q7-5: IC6.5 IC7.3
Q7-6: IC6.6 IC7.2
Q7-7: IC6.7 IC7.1
Q7-8: IC6.8 IC7.15
Q8-1: IC5.1 IC8.7
Q8-2: IC5.2 IC8.6
Q8-3: IC5.3 IC8.5
Q8-4: IC5.4 IC8.4
Q8-5: IC5.5 IC8.3
Q8-6: IC5.6 IC8.2
Q8-7: IC5.7 IC8.1
Q8-8: IC5.8 IC8.15
Q9-1: IC4.1 IC9.7
Q9-2: IC4.2 IC9.6
Q9-3: IC4.3 IC9.5
Q9-4: IC4.4 IC9.4
Q9-5: IC4.5 IC9.3
Q9-6: IC4.6 IC9.2
Q9-7: IC4.7 IC9.1
Q9-8: IC4.8 IC9.15
Q10-1: IC3.1 IC10.7 | length 157.3
  Top Layer w10: IC10.7 4365.16,610.16 4365.16,629.53 4380,644.37 v1(4380,645)
  Bottom Layer w10: v1(4380,645) 4430.71,695.71 IC3.1
Q10-2: IC3.2 IC10.6 | length 157.3
  Top Layer w10: IC10.6 4290,600 v1(4335,645)
  Bottom Layer w10: v1(4335,645) 4335,655.17 4380.71,700.88 IC3.2
Q10-3: IC3.3 IC10.5 | length 157.3
  Top Layer w10: IC10.5 4240,595 v1(4290,645)
  Bottom Layer w10: v1(4290,645) 4330.71,685.71 IC3.3
Q10-4: IC3.4 IC10.4 | length 157.3
  Top Layer w10: IC10.4 4215.16,610.16 4215.16,629.53 4230,644.37 v1(4230,645)
  Bottom Layer w10: v1(4230,645) 4230,650.17 4280.71,700.88 IC3.4
Q10-5: IC3.5 IC10.3 | length 157.3
  Top Layer w10: IC10.3 4140,600 v1(4185,645)
  Bottom Layer w10: v1(4185,645) 4230.71,690.71 IC3.5
Q10-6: IC3.6 IC10.2 | length 153.3
  Top Layer w10: IC10.2 4090,595 v1(4140,645)
  Bottom Layer w10: v1(4140,645) 4140,660 IC3.6@4180.71,700.71
Q10-7: IC3.7 IC10.1 | length 157.3
  Top Layer w10: IC10.1 4040,605 v1(4080,645)
  Bottom Layer w10: v1(4080,645) 4130.71,695.71 IC3.7
Q10-8: IC3.8 IC10.15
Q11-1: IC2.1 IC11.7 | length 157.8
  Top Layer w10: IC11.7 3004.33,602.76 v1(3051.18,649.61)
  Bottom Layer w10: v1(3051.18,649.61) 3051.18,651.57 3059.8,660.2 3063.65,660.2 3076.83,673.38 3076.83,677.22 IC2.1
Q11-2: IC2.2 IC11.6 | length 157.8
  Top Layer w10: IC11.6 2954.33,604.72 v1(2999.21,649.61)
  Bottom Layer w10: v1(2999.21,649.61) 3003.06,649.61 3054.33,700.88 IC2.2
Q11-3: IC2.3 IC11.5 | length 155.8
  Top Layer w10: IC11.5 2904.33,601.19 v1(2952.75,649.61)
  Bottom Layer w10: v1(2952.75,649.61) 2953.06,649.61 3004.33,700.88 IC2.3
Q11-4: IC2.4 IC11.4 | length 157.8
  Top Layer w10: IC11.4 2854.33,604.72 v1(2899.21,649.61)
  Bottom Layer w10: v1(2899.21,649.61) 2903.06,649.61 2954.33,700.88 IC2.4
Q11-5: IC2.5 IC11.3 | length 155.6
  Top Layer w10: IC11.3 2804.33,595.37 2854.32,645.36 v1(2854.32,649.61)
  Bottom Layer w10: v1(2854.32,649.61) 2854.33,650.88 2904.33,700.88 IC2.5
Q11-6: IC2.6 IC11.2 | length 157.8
  Top Layer w10: IC11.2 2754.33,604.72 v1(2799.21,649.61)
  Bottom Layer w10: v1(2799.21,649.61) 2803.06,649.61 2854.33,700.88 IC2.6
Q11-7: IC2.7 IC11.1 | length 155.6
  Top Layer w10: IC11.1 2704.33,595.37 2755.9,646.94 v1(2755.9,649.61)
  Bottom Layer w10: v1(2755.9,649.61) 2804.33,698.03 IC2.7
Q11-8: IC2.8 IC11.15 | length 137.6
  Top Layer w10: v1(2726.38,777.56) 2755.91,807.09 2755.91,816.25 IC11.15
  Bottom Layer w10: v1(2726.38,777.56) 2726.83,777.11 2726.83,732.22 IC2.8
Q12-1: IC1.1 IC12.7 | length 149.5
  Top Layer w10: IC12.7 1911.02,611.81 1948.82,649.61 v1(1961.13,649.61)
  Bottom Layer w10: v1(1961.13,649.61) 2000.39,688.87 IC1.1
Q12-2: IC1.2 IC12.6 | length 150.9
  Top Layer w10: IC12.6 1856.21,599.5 1906.32,649.61 v1(1909.45,649.61)
  Bottom Layer w10: v1(1909.45,649.61) 1950.39,690.55 IC1.2
Q12-3: IC1.3 IC12.5 | length 145.1
  Top Layer w10: IC12.5 1811.02,604.31 1856.32,649.61 v1(1861.13,649.61)
  Bottom Layer w10: v1(1861.13,649.61) 1900.39,688.87 IC1.3
Q12-4: IC1.4 IC12.4 | length 145
  Top Layer w10: IC12.4 1761.02,604.31 1806.32,649.61 v1(1811.02,649.61)
  Bottom Layer w10: v1(1811.02,649.61) 1850.39,688.98 IC1.4
Q12-5: IC1.5 IC12.3 | length 145.1
  Top Layer w10: IC12.3 1711.02,604.31 1756.32,649.61 v1(1761.13,649.61)
  Bottom Layer w10: v1(1761.13,649.61) 1800.39,688.87 IC1.5
Q12-6: IC1.6 IC12.2 | length 145.9
  Top Layer w10: IC12.2 1661.02,604.31 1706.32,649.61 v1(1711.13,649.61)
  Bottom Layer w10: v1(1711.13,649.61) 1712.6,649.61 1750.39,687.4 IC1.6
Q12-7: IC1.7 IC12.1 | length 142.3
  Top Layer w10: IC12.1 1611.02,607.09 v1(1653.54,649.61)
  Bottom Layer w10: v1(1653.54,649.61) 1653.54,654.02 1700.39,700.88 IC1.7
Q12-8: IC1.8 IC12.15 | length 497.7
  Top Layer w10: v1(1555.12,649.61) 1555.12,664.76 1570,679.64 1570,700.36 1574.8,705.16 1574.8,846.46 1599.65,871.3 1628.7,871.3 1656.18,843.82 1656.18,805.08 1659.02,802.24 1661.02,802.24 IC12.15
  Bottom Layer w10: v1(1555.12,649.61) 1599.12,649.61 1650.39,700.88 IC1.8
VCC: C1.2 C2.2 C5.2 D1.3 DC-DC1.1 DC-DC1.2 DC-DC2.1 F1.2 L1.1 | length 4285.1
  Top Layer w30: DC-DC2.1 v2(385.9,1468.58) 531.5,1614.17 1023.62,1614.17 1102.36,1692.91 1102.36,2255.9 C1.2 1158.5,2554.09 D1.3 ; DC-DC1.2 393.7,2145.67 438.19,2145.67 DC-DC1.1 545.67,2151.18 590.55,2106.3 590.55,2047.24 649.61,1988.19 885.83,1988.19 944.88,2047.24 L1.1 v4(944.88,2322.83) 944.88,2534.41 D1.3 ; F1.2 795.81,2554.09 D1.3
  Bottom Layer w30: C2.2 374.02,2224.41 472.44,2322.83 v4(944.88,2322.83) ; v2(385.9,1468.58) 385.9,1385.75 C5.2
pads on no net: DC-DC1.4 DC-DC3.1 DC-DC3.6 DC-DC3.8 IC12.9 IC13.1 IC13.2 IC13.3 IC13.4 IC13.5 IC13.6 IC13.7 IC13.8 IC13.9 IC13.12 IC13.13 IC13.14 IC13.16 IC13.17 IC13.18 IC13.19 IC13.22 IC13.24 IC13.25 IC13.26 IC13.29 IC13.30 IC18.11 IC18.12 J1.4 LED1.1 LED1.6 LED2.1 LED2.6 LED3.1 LED3.6 LED4.1 LED4.6 LED5.1 LED5.6 LED6.1 LED6.3 LED6.6

## Silkscreen, mask and mechanical layers (free items; w line width, h text height)
Top Overlay:
  text "Isaac Wong / Dec 2018 / VFD Clock" at 9235,220 h60
Bottom Overlay:
  text "Isaac Wong / Dec 2018 / VFD Clock" at 9835,215 h60
Mechanical 1:
  circle w10: c118.11,2874.02 r59.06
  circle w10: c118.11,118.11 r59.06
  circle w10: c9881.89,118.11 r59.06
  circle w10: c9881.89,2874.02 r59.06
  lines w10: 0,0 10000,0 10000,3000 0,3000 0,0